# Altium PCB Power.PcbDoc
Units mil, origin at the board's own origin, x right, y up, seen from the top; angles counter-clockwise.
Board outline 6000 x 4000 mil, 2 copper layers (Top Layer, Bottom Layer); 15 components, 8 nets, 49 pads, 0 vias.
Unrouted connection lines stored in the file: 28.
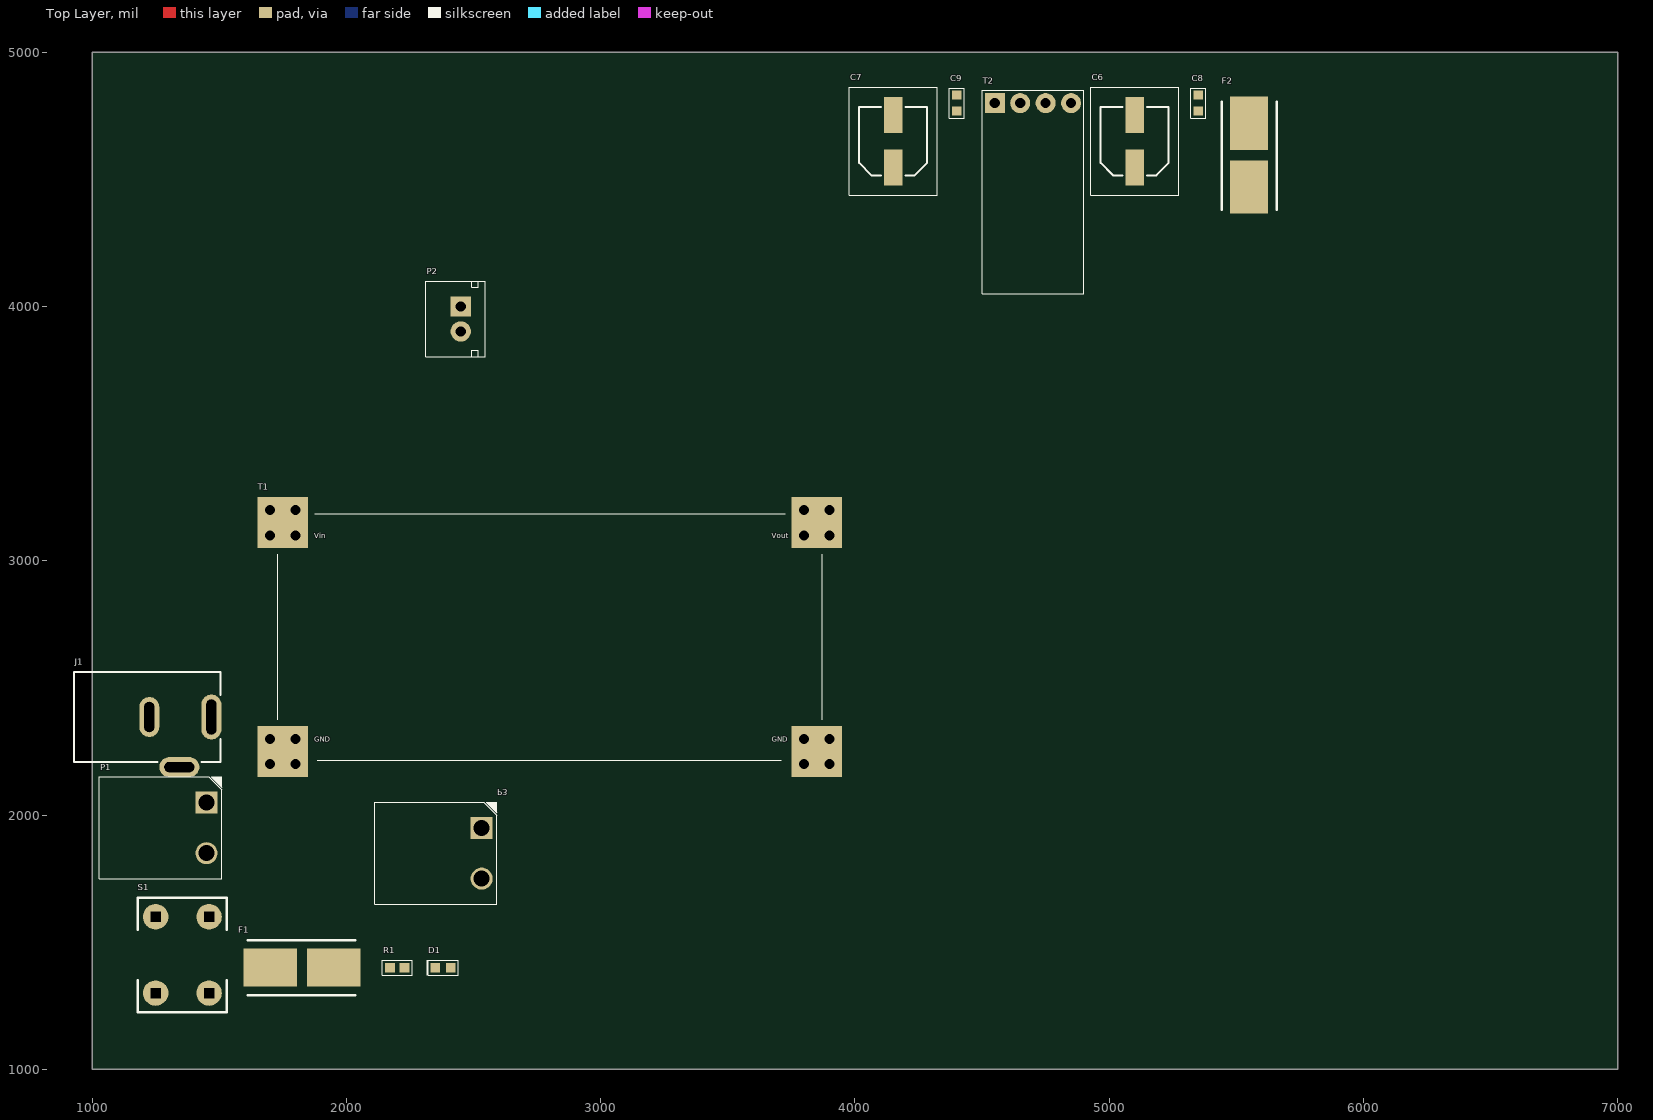
[diagram p0: Top Layer view]
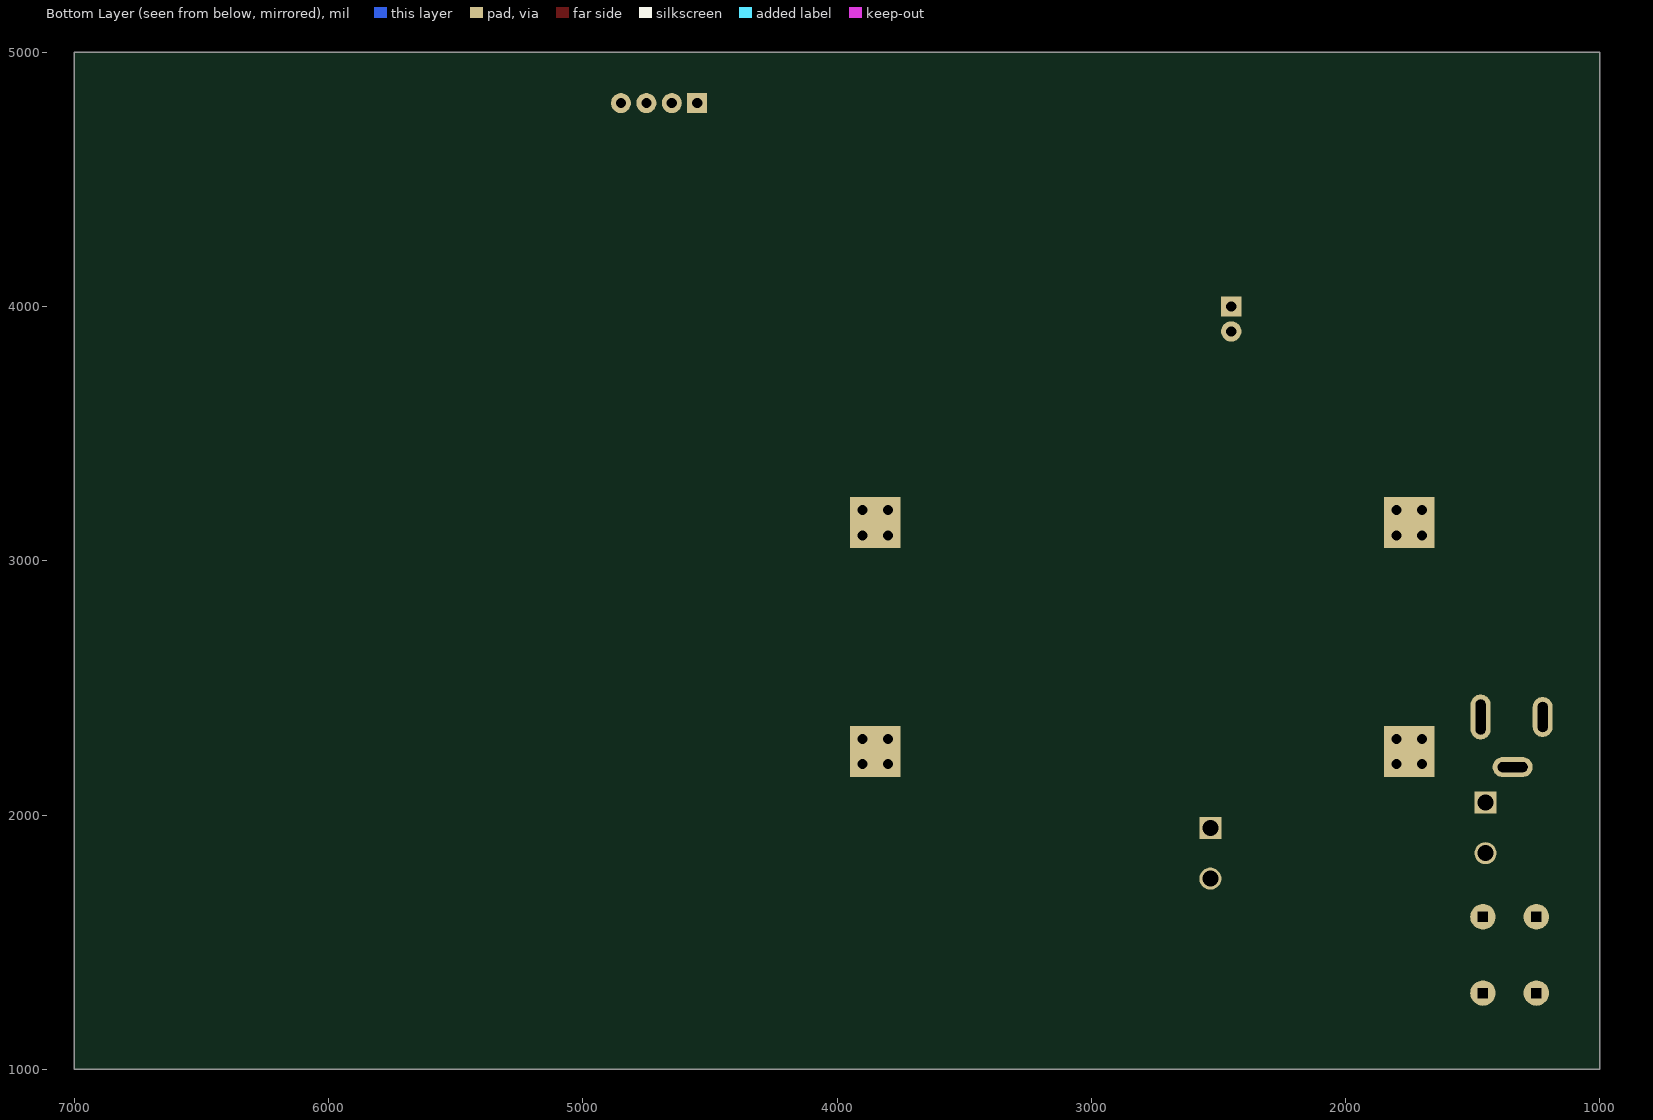
[diagram p1: Bottom Layer view, seen from below]

## Layer stack, top to bottom
Top Solder: solder mask 0.4, Solder Resist, Dk 3.5
Top Layer: signal copper 1.4
Dielectric 1: dielectric 12.6, FR-4, Dk 4.8
Bottom Layer: signal copper 1.4
Bottom Solder: solder mask 0.4, Solder Resist, Dk 3.5

## Board outline
1000,1000 7000,1000 7000,5000 1000,5000

## Design rules (kind name [scope] priority, off if disabled: settings)
Clearance "Schematic Clearance Constraint_1" [InNetClass('battery_power')] p1: gap=25.59 ignorepadtopadclearanceinfootprint=TRUE except(0: Arc-Hole Track-Hole SMDPad-Hole THPad-Hole Via-Hole Fill-Hole Poly-Hole Region-Hole Text-Hole)
Clearance "Schematic Clearance Constraint" [InNet('D_3P3')] p2: gap=23.62 ignorepadtopadclearanceinfootprint=TRUE except(0: Arc-Hole Track-Hole SMDPad-Hole THPad-Hole Via-Hole Fill-Hole Poly-Hole Region-Hole Text-Hole)
Clearance [All] p3: gap=10 ignorepadtopadclearanceinfootprint=FALSE except(0: Arc-Hole Track-Hole SMDPad-Hole THPad-Hole Via-Hole Fill-Hole Poly-Hole Region-Hole Text-Hole)
PolygonConnect [All] p1: connectstyle=Relief reliefconductorwidth=10 reliefentries=4 polygonreliefangle="90 Angle" airgapwidth=10
RoutingVias "Schematic Routing Via Style_1" [InNet('D_3P3')] p1: holewidth=10 width=20 viastyle="Through Hole" minholewidth=10 minwidth=20 maxholewidth=28 maxwidth=50
RoutingVias "Schematic Routing Via Style" [InNetClass('battery_power')] p2: holewidth=35.43 width=65.75 viastyle="Through Hole" minholewidth=28 minwidth=50 maxholewidth=59.06 maxwidth=82.28
RoutingVias [All] p3: holewidth=28 width=50 viastyle="Through Hole" minholewidth=28 minwidth=50 maxholewidth=28 maxwidth=50
SolderMaskExpansion [All] p1: expansion=4 istentingtop=FALSE
Width "Schematic Width Constraint_1" [InNetClass('battery_power')] p1: maxlimit=78.74 minlimit=10 preferedwidth=65.75
Width "Schematic Width Constraint" [InNet('D_3P3')] p2: maxlimit=15 minlimit=10 preferedwidth=10
Width [All] p3: maxlimit=10 minlimit=10 preferedwidth=10
30 further rules are at their usual default settings.

## Classes and differential pairs
net class digital_3P3v: D_3P3
net class battery_power: B_12V GND NetD1_1 NetF1_1 NetF1_2

## Components (designator, comment, footprint, x,y, rotation, side; value= is the part's Value field where it differs from the comment)
C6 "SMD 25V 220uF" VZT221M1ETR-0607 5100,4650 r90 top value=1000uF
C7 "25V 220uF" VZT221M1ETR-0607 4150,4650 r90 top value=1000uF
C8 "50V 0.1uF" 0603F104M500NT 5350,4800 r90 top value=1uF
C9 "50V 0.1uF" 0603F104M500NT 4400,4800 r90 top value=1uF
D1 "0603 LED(G)" BL-HG036D-AV-TRB 2321.46,1429.53 r0 top
F1 "220V 10A Fuse" "SMD FUSES HOLDER" 1830,1400 r0 top
F2 "220V 5A Fuse" "SMD FUSES HOLDER" 5550,4600 r90 top
J1 "PWR2.5" PWD2.5 1150,2350 r0 top
P1 "battery pin" KF2EDGR-5.08-2P 1509.06,2150 r270 top
P2 "battery display pin" B2B-XH-A 2546.94,4099.94 r270 top
P3 "drive power out pin" KF2EDGR-5.08-2P 2590.94,2050 r270 top
R1 "0603 150k 1/10w Res" RS-03K1503FT 2200,1400 r180 top
S1 "drive SW" 4.8插片 1355,1450 r270 top
T1 "XL4015" XL4015 1700,3200 r0 top
T2 "Small Power Supply" "SMALL VOLTAGE REGULATOR MODULE" 4500,4850 r0 top

## Footprints (in the part's own frame and the unit in brackets; to place one, negate y for a bottom-side part, rotate by r counter-clockwise, add the part's x,y. Pads: shape width x height; smd on the part's side, far side on the other; paste and mask are expansions set on the pad)
4.8插片 [mil]
  round 100 hole 39.37 square: 1(-150,105) 1(-150,-105) 2(150,105) 2(150,-105)
  silkscreen extent -225,-175 225,175
0603F104M500NT [mm] "0603 50V 0.1uF SMD MLCC"
  rect 0.9x0.95 smd: 1(-0.8,0) 2(0.8,0)
  silkscreen extent -1.5,-0.75 1.5,0.75, body extent -0.85,-0.45 0.85,0.45, height 0.9
B2B-XH-A [mil] "XH header, top vesion, 2 pin"
  rect 80x80 hole 40: 1(99.94,-96.94)
  round 80 hole 40: 2(197.94,-96.94)
  silkscreen extent 0,-234 298,0
BL-HG036D-AV-TRB [mm] "0603 SMD LED(G)"
  rect 0.95x0.95 smd: 1(0.725,-0.75) 2(2.275,-0.75)
  silkscreen extent -0.06,-1.5 3,0, body extent 0.65,-1.2 2.35,-0.3, height 0.9
KF2EDGR-5.08-2P [mm] "KF2EDGR-5.08 header, side version, 2 pin"
  rect 2.2x2.2 hole 1.6: 1(2.54,-1.5)
  round 2.2 hole 1.6: 2(7.62,-1.5)
  silkscreen extent 0,-12.2 10.16,0, body extent 0,-12.2 10.16,0, height 8.4
PWD2.5 [mm]
  oval 2x4.5 hole 1 slot 3.5 at 90 deg: 1(8.105,0.905)
  oval 2x4 hole 1 slot 3 at 90 deg: 2(1.905,0.905)
  oval 4x2 hole 1 slot 3 at 0 deg: 3(4.905,-4.095)
  silkscreen extent -5.6,-3.6 9.01,5.41
RS-03K1503FT [mm] "0603 150k 1/10w Resistor"
  rect 1x0.95 smd: 1(-0.725,0) 2(0.725,0)
  silkscreen extent -1.5,-0.75 1.5,0.75, body extent -0.87,-0.48 0.87,0.48, height 0.5
"SMALL VOLTAGE REGULATOR MODULE" [mm]
  rect 2x2 hole 1.02: 1(1.27,-1.27)
  round 2 hole 1.02: 2(3.81,-1.27) 3(6.35,-1.27) 4(8.89,-1.27)
  silkscreen extent 0,-20.32 10.16,0
"SMD FUSES HOLDER" [mil] "SMD 1808 Fuse Holder"
  rect 210x150 smd: 1(-130,0) 2(121,0)
  silkscreen extent -219,-108 205,108
VZT221M1ETR-0607 [mm] "SMD 6.3x7.7mm 220uF 25V Capacitor"
  rect 3.6x1.85 smd: 1(-2.625,0) 2(2.625,0)
  silkscreen extent -5.4,-4.4 5.4,4.4, body extent -3.6,-3.4 3.6,3.4, height 8
XL4015 [mm] "5A DC-DC Non-isolated voltage regulator module"
  rect 2x2 hole 1: 1(0,-2.54) 1(2.54,-2.54) 1(2.54,0) 2(0,-25.4) 2(2.54,-25.4) 2(2.54,-22.86) 3(53.34,-2.54) 3(55.88,-2.54) 3(55.88,0) 4(53.34,-25.4) 4(55.88,-25.4) 4(55.88,-22.86)
  rect 5.08x5.08 hole 1 copper offset 1.27,-1.27: 1(0,0) 2(0,-22.86) 3(53.34,0) 4(53.34,-22.86)
  silkscreen extent 0.74,-25 55.14,-0.4

## Part data
C6 C7: library part "Cap Pol1", "-45℃~+105℃ 2000hrs@105℃ 220uF 7.7mm 25V 6.3mm ±20% SMD,6.3x7.7mm Aluminum Electrolytic Capacitors - SMD ROHS", ComponentLink1Description=buy_link, ComponentLink1URL=https://shopee.tw/(%E5%85%83%E8%80%80)-%E7%9B%B4%E6%8F%92-%E9%9B%BB%E8%A7%A3%E9%9B%BB%E5%AE%B9-47uF~1000uF-16V~50V-%E9%AB%94%E7%A9%8D-8*14.5mm~10*19.5mm(5%E9%A1%86%E4%B8%80%E6%A8%99)-i.140576581.2524079905?sp_atk=ccd45567-e386-4bfb-a6e8-2480335a57a5, LatestRevisionDate=17-Jul-2002, LatestRevisionNote="Re-released for DXP Platform.", PackageDescription="Polarized Capacitor (Radial); 2 Leads", PackageReference=RB7.6-15, Published=8-Jun-2000, Publisher="Altium Limited"
C8 C9: library part "Cap Semi", "50V 100nF Y5V ±20% 0603 Multilayer Ceramic Capacitors MLCC - SMD/SMT ROHS", LatestRevisionDate=29-May-2009, LatestRevisionNote="IPC-7351 Footprint Added.", PackageDescription="Chip Capacitor", PackageReference=C1206, Published=8-Jun-2000, Publisher="Altium Limited"
D1: library part LED0, "SMD 0603 LED(G)", LatestRevisionDate=08-Jul-2005, LatestRevisionNote="Mech Layer 1 removed.", PackageDescription="LED; 2 Leads", PackageReference=LED-0, Published=8-Jun-2000, Publisher="Altium Limited"
F1: library part "Fuse 1", "0451010.MRL", LatestRevisionDate=17-Jul-2002, LatestRevisionNote="Re-released for DXP Platform.", PackageDescription="Thru-Hole; 2 Leads", PackageReference=PIN-W2/E2.8, Published=8-Jun-2000, Publisher="Altium Limited"
F2: library part "Fuse 1", "0451005.MRL", LatestRevisionDate=17-Jul-2002, LatestRevisionNote="Re-released for DXP Platform.", PackageDescription="Thru-Hole; 2 Leads", PackageReference=PIN-W2/E2.8, Published=8-Jun-2000, Publisher="Altium Limited"
J1: "Low Voltage Power Supply Connector", ComponentLink1Description="Manufacturer Link", ComponentLink1URL=http://domino.kycon.com/internet/Products.html, DatasheetDocument=09-May-2002, Published=17-Dec-2003, Publisher="Altium Limited"
P1 P3: library part "Header 2", "KF2EDGR-5.08-2P, 5.08mm, 2 pin", LatestRevisionDate=17-Jul-2002, LatestRevisionNote="Re-released for DXP Platform.", Publisher="Altium Limited"
P2: library part "Header 2", "B2B-XH-A", LatestRevisionDate=17-Jul-2002, LatestRevisionNote="Re-released for DXP Platform.", Publisher="Altium Limited"
R1: library part Res1, "0603 150k 1/10w Resistor", LatestRevisionDate=17-Jul-2002, LatestRevisionNote="Re-released for DXP Platform.", PackageDescription="Axial Device, Thru-Hole; 2 Leads; 0.3 in Pin Spacing", PackageReference=AXIAL-0.3, Published=8-Jun-2000, Publisher="Altium Limited"
S1: library part SW-SPST, LatestRevisionDate=17-Jul-2002, LatestRevisionNote="Re-released for DXP Platform.", PackageDescription="Switch; 2 Leads", PackageReference=SPST-2, Published=24-Mar-1999, Publisher="Altium Limited"
T1: "5A DC-DC Non-isolated Voltage Regulator Module"
T2: library part "Small Voltage Regulator", "Supper Smaill Non-isolated Voltage Regulator Module", BuyLink=https://www.ruten.com.tw/item/show?21817939184609

## Nets (pads, with @x,y where several pads share a name; then routed paths per layer and width w, separated by ;. In a path a pad name is that pad's centre, name@x,y a point inside that pad or via, vN(x,y) a via of type N, cw(c..) or ccw(c..) an arc to the next point about the centre after c; other vN are vias at no path point)
B_12V: F2.1 J1.1 P1.1 P2.1 S1.1
D_3P3: C7.1 C9.2 T2.1
D_5V: C6.1 C8.2 T1.3 T2.3
GND: C6.2 C7.2 C8.1 C9.1 D1.2 J1.2 J1.3 P1.2 P2.2 P3.2 T1.2 T1.4 T2.2
NetD1_1: D1.1 R1.1
NetF1_1: F1.1 S1.2
NetF1_2: F1.2 P3.1 R1.2
NetF2_2: F2.2 T1.1
pads on no net: T2.4

## Text inside footprints (layer, text, board x,y; h text height)
T1: Top Overlay "Vout" at 3673.07,3088.19 h19.68; Top Overlay "GND" at 3673.07,2288.19 h19.68; Top Overlay "GND" at 1873.07,2288.19 h19.68; Top Overlay "Vin" at 1873.07,3088.19 h19.68